# Altium PCB MasterBoard.PcbDoc (part 1 of 3)
Units mil, origin at the board's own origin, x right, y up, seen from the top; angles counter-clockwise.
Board outline 13400 x 7290 mil, 2 copper layers (Top Layer, Bottom Layer); 563 components, 331 nets, 1403 pads, 323 vias.
Unrouted connection lines stored in the file: 87.
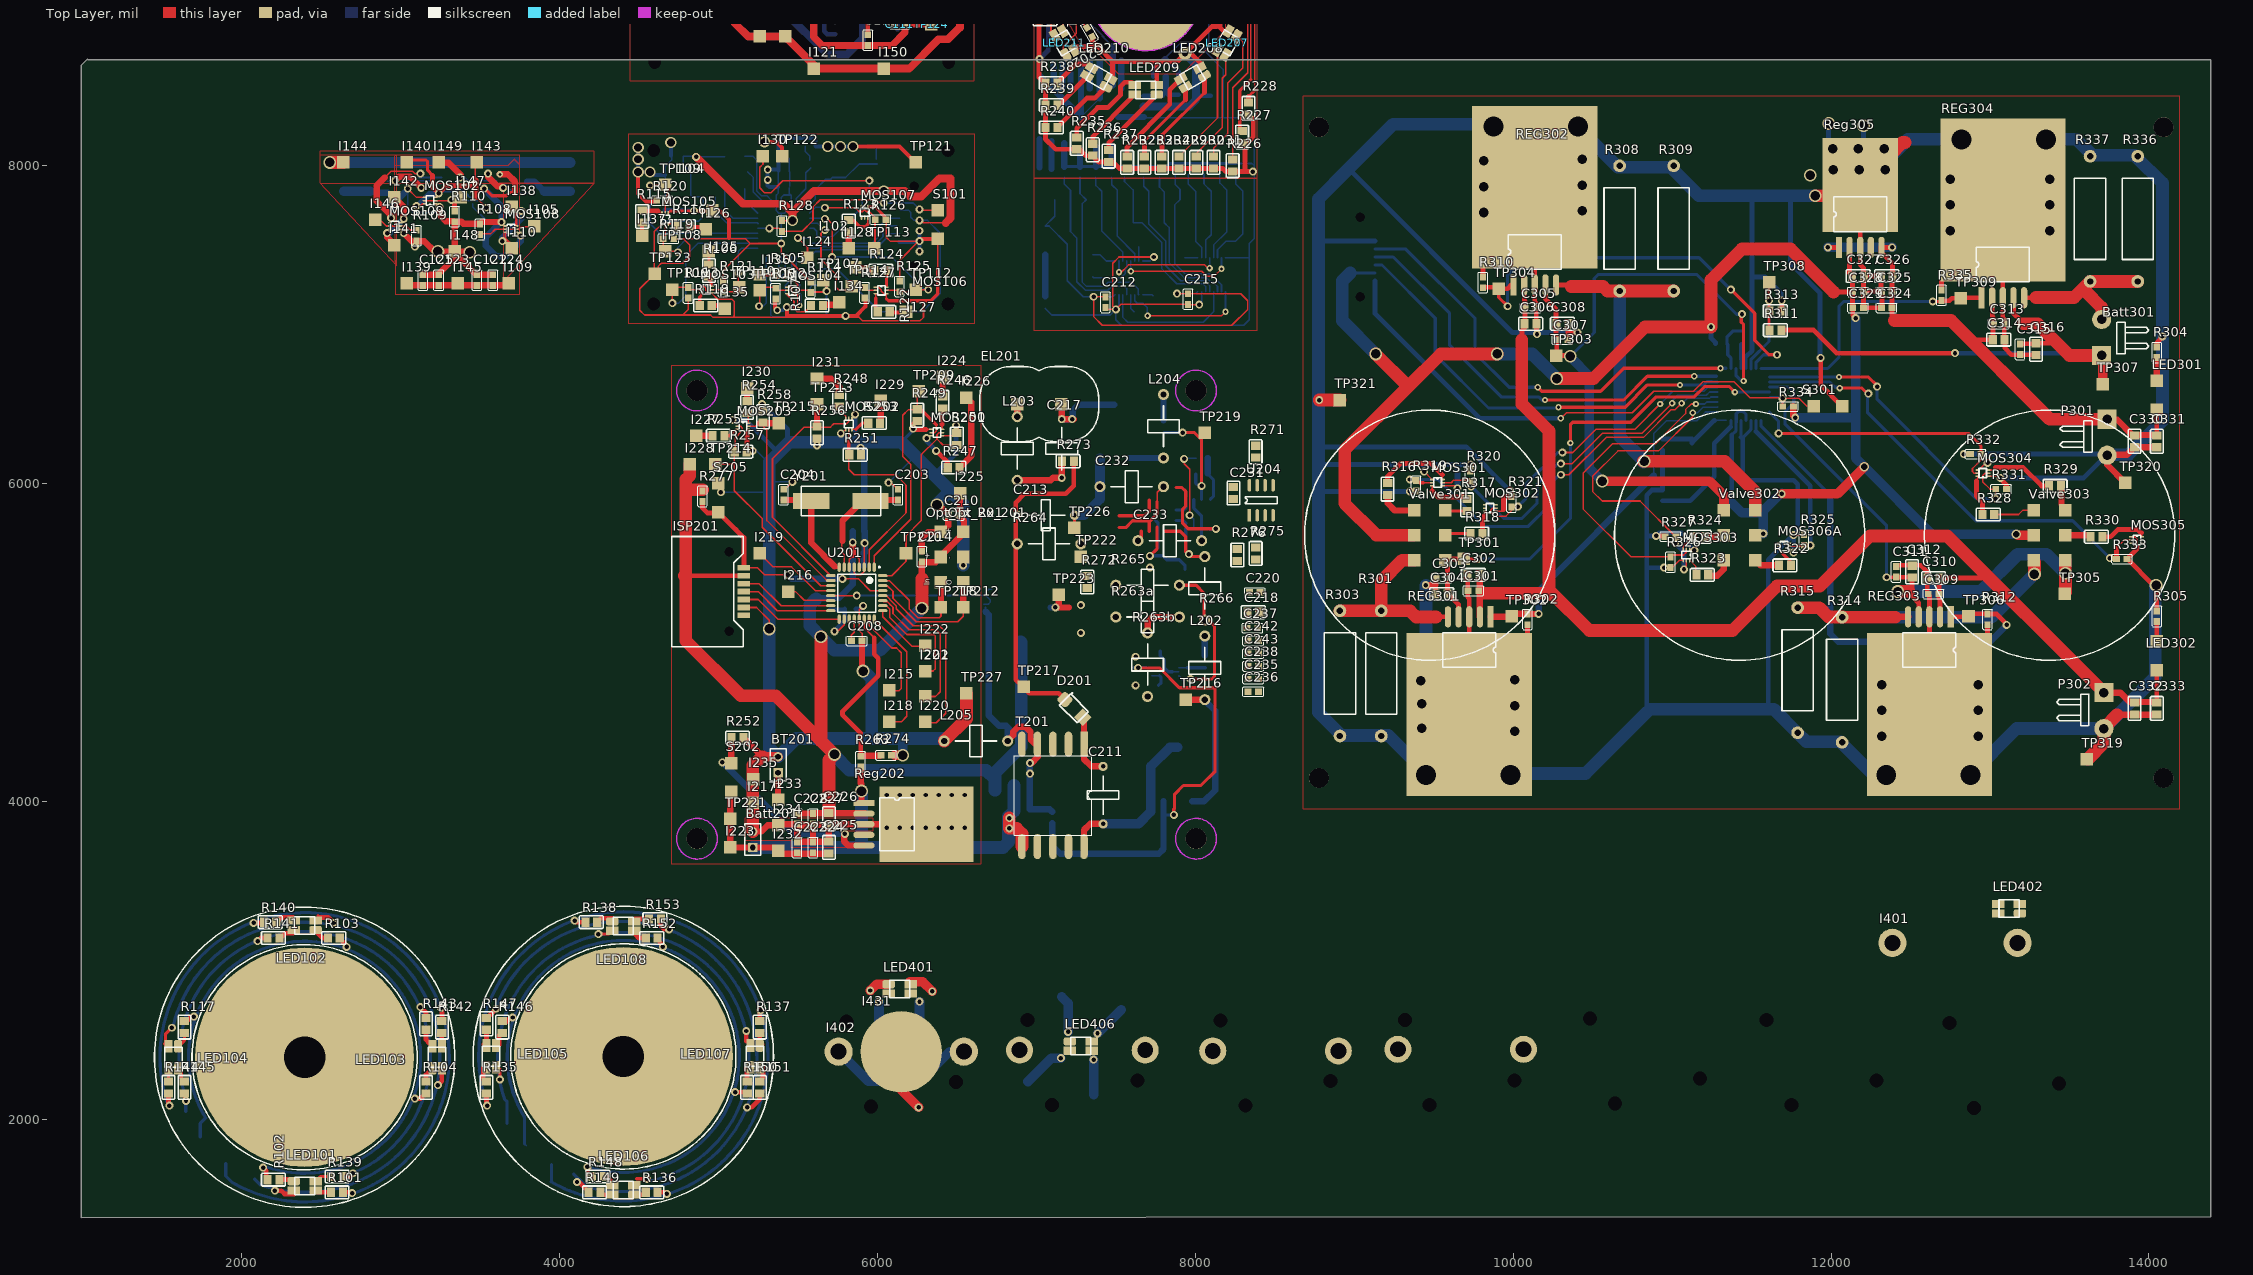
[diagram p0: Top Layer view]
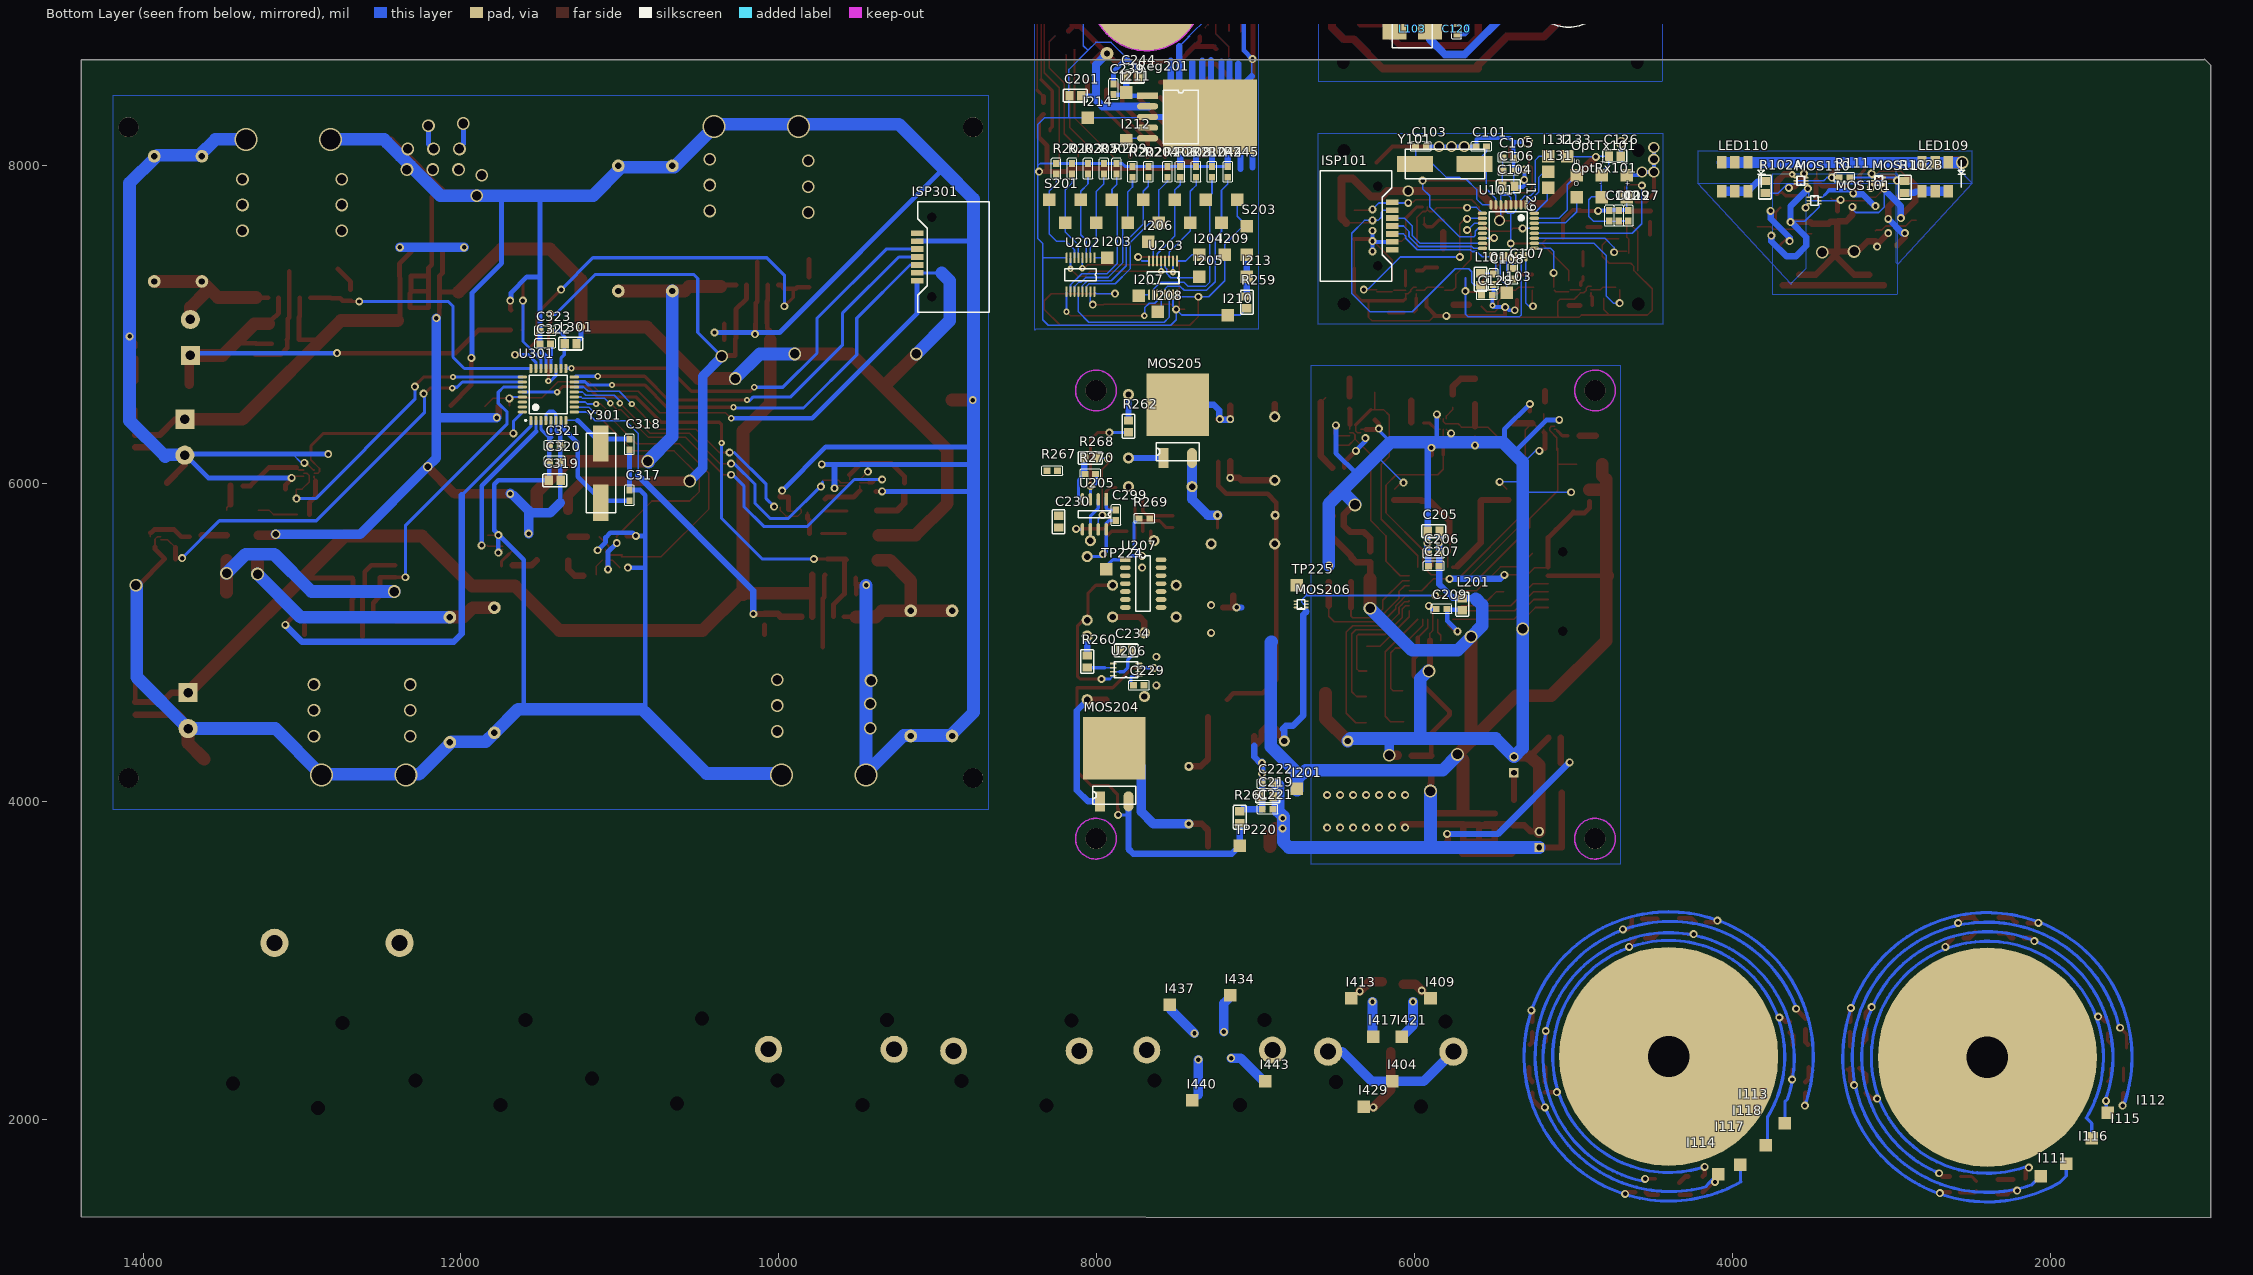
[diagram p1: Bottom Layer view, seen from below]

## Layer stack, top to bottom
Top Layer: signal copper 1.4
Dielectric: dielectric 12.6, FR-4, Dk 4.8
Bottom Layer: signal copper 1.4

## Board outline
990,1380 990,8630 1030,8670 1035,8665 14390,8665 14390,1385

## Design rules (kind name [scope] priority, off if disabled: settings)
Clearance [All] p1: gap=10
ComponentClearance [All] p1 off: gap=10 collisioncheckmode=3 verticalgap=10 showdistances=FALSE
HoleSize [All] p1: absolutevalues=TRUE maxlimit=260 minlimit=1 maxpercent=80.000 minpercent=20.000
MinimumSolderMaskSliver [All] p1: minsoldermaskwidth=2.5
PasteMaskExpansion [All] p1 off: expansion=0
PlaneClearance [All] p1: clearance=39.37
PlaneConnect [All] p1: planeconnectstyle=Relief reliefexpansion=20 reliefentries=4 reliefconductorwidth=10 reliefairgap=20
PolygonConnect [All] p1: connectstyle=Relief reliefconductorwidth=10 reliefentries=4 polygonreliefangle="90 Angle"
RoomDefinition Glasses-LEDBoard [InComponentClass('Glasses-LEDBoard')] p1: confinementstyle=ConfineIn formatcopy=TRUE lockcomponents=FALSE outline 2435,7110 4300,7110 4300,8155 2435,8155
RoomDefinition Glasses-LensBoard [InComponentClass('Glasses-LensBoard')] p2: confinementstyle=ConfineIn formatcopy=TRUE lockcomponents=FALSE outline 1415,1415 5395,1415 5395,3385 1415,3385
RoomDefinition Valve [InComponentClass('Valve')] p3: confinementstyle=ConfineIn formatcopy=TRUE lockcomponents=FALSE outline 5530,1615 14300,1615 14300,3405 5530,3405
RoomDefinition Glasses-PSUBoard [InComponentClass('Glasses-PSUBoard')] p4: confinementstyle=ConfineIn formatcopy=TRUE lockcomponents=FALSE outline 4420,8475 6745,8475 6745,9740 4420,9740
RoomDefinition Glasses [InComponentClass('Glasses')] p5: confinementstyle=ConfineIn formatcopy=TRUE lockcomponents=FALSE outline 4435,6980 6615,6980 6615,8250 4435,8250
RoomDefinition Controller-IOBoard [InComponentClass('Controller-IOBoard')] p6: confinementstyle=ConfineIn formatcopy=TRUE lockcomponents=FALSE outline 8470,6890 8470,10035 6925,10035 6925,6890
RoomDefinition Controller [InComponentClass('Controller')] p7: confinementstyle=ConfineIn formatcopy=TRUE lockcomponents=FALSE outline 4680,3575 8185,3575 8185,6775 4680,6775
RoomDefinition Charger [InComponentClass('Charger')] p8: confinementstyle=ConfineIn formatcopy=TRUE lockcomponents=FALSE outline 8665,3895 14250,3895 14250,8440 8665,8440
RoutingVias [All] p1: holewidth=28 width=50 viastyle="Through Hole" minholewidth=20 minwidth=40 maxholewidth=260 maxwidth=300
SilkToSilkClearance [All] p1 off: silktosilkclearance=10
SilkscreenOverComponentPads [All] p1 off: minsilkscreentomaskgap=10
SolderMaskExpansion [All] p1: expansion=4
Width [All] p1: maxlimit=118.11 minlimit=10 preferedwidth=20
20 further rules are at their usual default settings.

## Classes and differential pairs
component class Valve: I401 I402 I403 I404 I405 I406 I407 I408 I409 I410 I411 I412 I413 I414 I415 I416 I417 I418 I419 I420 I421 I422 I423 I424 I425 I426 I427 I428 I429 I430 I431 I432 I433 I434 I435 I436 I437 I438 I439 I440 I441 I442 I443 I444 LED401 LED402 LED403 LED404 LED405 LED406 LED407
component class Charger: Batt301 C301 C302 C303 C304 C305 C306 C307 C308 C309 C310 C311 C312 C313 C314 C315 C316 C317 C318 C319 C320 C321 C322 C323 C324 C325 C326 C327 C328 C329 C330 C331 C332 C333 D? ISP301 L301 LED301 LED302 MOS301 MOS302 MOS303 MOS304 MOS305 MOS306A P301 P302 R301 R302 R303 R304 R305 R308 R309 R310 R311 R312 R313 R314 R315 R316 R317 R318 R319 R320 R321 R322 R323 R324 R325 R326 R327 R328 R329 R330 R331 R332 R333 R334 R335 R336 R337 R? REG301 REG302 REG303 REG304 Reg305 S301 TP301 TP302 TP303 TP304 TP305 TP306 TP307 TP308 TP309 TP319 TP320 TP321 U301 Valve301 Valve302 Valve303 Y301
component class Controller: Batt201 BT201 C203 C204 C205 C206 C207 C208 C209 C210 C211 C213 C214 C217 C218 C219 C220 C221 C222 C223 C224 C225 C226 C227 C228 C229 C230 C231 C232 C233 C234 C235 C236 C237 C238 C242 C243 C299 D201 EL201 I201 I202 I215 I216 I217 I218 I219 I220 I221 I222 I223 I224 I225 I226 I227 I228 I229 I230 I231 I232 I233 I234 I235 ISP201 L201 L202 L203 L204 L205 MOS201 MOS202 MOS203 MOS204 MOS205 MOS206 Opt_Rx_201 Opt_Tx_201 R246 R247 R248 R249 R250 R251 R252 R253 R254 R255 R256 R257 R258 R260 R261 R262 R263 R263a R263b R264 R265 R266 R267 R268 R269 R270 R271 R272 R273 R274 R275 R276 R277 Reg202 S202 S205 T201 TP209 TP210 TP212 TP213 TP214 TP215 TP216 TP217 TP218 TP219 TP220 TP221 TP222 TP223 TP224 TP225 TP226 TP227 U201 U204 U205 U206 U207 Y201
component class Glasses: C101 C102 C103 C104 C105 C106 C107 C108 C109 C126 C127 C128 I102 I103 I104 I124 I125 I126 I127 I128 I129 I130 I131 I132 I133 I134 I135 I136 I137 I? ISP101 L101 MOS103 MOS104 MOS105 MOS106 MOS107 OptRx101 OptTx101 R105 R106 R107 R112 R113 R114 R115 R116 R118 R119 R120 R121 R122 R123 R124 R125 R126 R127 R128 S101 TP105 TP106 TP107 TP108 TP109 TP110 TP112 TP113 TP114 TP121 TP122 TP123 U101 Y101
component class Controller-IOBoard: C201 C202 C212 C215 C239 C240 C241 C244 I203 I204 I205 I206 I207 I208 I209 I210 I211 I212 I213 I214 LED201 LED202 LED203 LED204 LED205 LED206 LED207 LED208 LED209 LED210 LED211 R201 R202 R203 R204 R205 R206 R207 R208 R209 R210 R211 R212 R213 R214 R215 R216 R217 R218 R219 R220 R221 R222 R223 R224 R225 R226 R227 R228 R229 R230 R231 R232 R233 R234 R235 R236 R237 R238 R239 R240 R241 R242 R243 R244 R245 R259 Reg201 S201 S203 S204 TP201 TP203 TP204 TP205 TP206 TP207 TP208 U202 U203
component class Glasses-LEDBoard: C122 C123 C124 C125 I105 I109 I110 I138 I139 I140 I141 I142 I143 I144 I145 I146 I147 I148 I149 LED109 LED110 MOS101 MOS102 MOS108 MOS109 MOS110 MOS111 R102A R102B R108 R109 R110 R111 TP126
component class Glasses-PSUBoard: C110 C111 C112 C113 C114 C115 C116 C117 C118 C119 C120 C121 D101 D102 I106 I107 I108 I119 I120 I121 I122 I123 I150 I151 L102 L103 PWR101 PWR102 R129 R130 R131 R132 R133 R134 TP116 TP117 TP118 TP119 TP124 Valve101 Valve102 Valve103
component class Glasses-LensBoard: I111 I112 I113 I114 I115 I116 I117 I118 LED101 LED102 LED103 LED104 LED105 LED106 LED107 LED108 R101 R102 R103 R104 R117 R135 R136 R137 R138 R139 R140 R141 R142 R143 R144 R145 R146 R147 R148 R149 R150 R151 R152 R153

## Components (designator, comment, footprint, x,y, rotation, side; value= is the part's Value field where it differs from the comment)
Batt201 "BaseBankSocket" HDR1X2 5215,3710 r90 top
Batt301 "BaseBankSocket" HDR1X2H 13750,6865 r90 top
BT201 "Battery" BAT-2 5375,4230 r90 top
C101 "18pf" 0603 5580,8120 r180 bottom
C102 "100nf" 0603 4775,7685 r270 bottom
C103 "18pf" 0603 5960,8120 r0 bottom
C104 "10uf" 0805 5410,7870 r0 bottom
C105 "1uf" 0603 5410,8050 r0 bottom
C106 "100nf" 0603 5410,7970 r0 bottom
C107 "100nf" 0603 5380,7320 r270 bottom
C108 "100nf" 0603 5505,7285 r90 bottom
C109 "100nf" 0603 4715,7685 r270 bottom
C110 "10uf" 0805 6140,9010 r180 top
C111 "1uf" 0603 6140,8890 r180 top
C112 "10uf" 0805 6340,9050 r90 top
C113 "10uf" 0805 6440,9050 r90 top
C114 "10uf" 0805 6100,9450 r180 bottom
C115 "1uf" 0603 6100,9350 r180 bottom
C116 "10uf" 0805 6275,9360 r0 bottom
C117 "10uf" 0805 6275,9220 r0 bottom
C118 "100nf" 0603 5900,9390 r0 top
C119 "2.2nf" 0603 5940,8790 r90 top
C120 "100nf" 0603 5735,8860 r90 bottom
C121 "2.2nf" 0603 5815,9560 r270 bottom
C122 "1uf" 0603 3480,7280 r270 top
C123 "100nf" 0603 3240,7280 r270 top
C124 "1uf" 0603 3580,7280 r270 top
C125 "100nf" 0603 3140,7280 r270 top
C126 "10uf" 0805 4740,8060 r0 bottom
C127 "1uf" 0603 4655,7685 r270 bottom
C128 "100nf" 0603 5545,7185 r0 bottom
C201 "10uf" 0805 8135,8440 r180 bottom
C202 "1uf" 0603 7335,8840 r300 top
C203 "18pf" 0603 6130,5930 r270 top
C204 "18pf" 0603 5410,5930 r270 top
C205 "10uf" 0805 5880,5700 r180 bottom
C206 "1uf" 0603 5880,5560 r180 bottom
C207 "100nf" 0603 5880,5480 r180 bottom
C208 "100nf" 0603 5870,5010 r180 top
C209 "100nf" 0603 5830,5210 r180 bottom
C210 "100nf" 0603 6480,5800 r0 top
C211 "Cap HV" "10n MU Capacitor (HV)" 7420,4220 r270 top
C212 "1uf" 0603 7435,7140 r270 top
C213 "Cap HV" "10n MU Capacitor (HV)" 7240,5800 r180 top
C214 "100nf" 0603 6280,5540 r270 top
C215 "1uf" 0603 7955,7160 r90 top
C217 "Cap HV" "22N MU Capacitor (HV)" 7160,6405.04 r270 top
C218 "10uf" 0805 8365,5190 r180 top
C219 "10uf" 0805 6925,4030 r0 bottom
C220 "1uf" 0603 8375,5315 r180 top
C221 "1uf" 0603 6925,3950 r0 bottom
C222 "100nf" 0603 6925,4110 r0 bottom
C223 "100nf" 0603 5495,3710 r270 top
C224 "1uf" 0603 5595,3710 r270 top
C225 "10uf" 0805 5695,3710 r270 top
C226 "10uf" 0805 5695,3890 r90 top
C227 "1uf" 0603 5595,3890 r90 top
C228 "100nf" 0603 5495,3890 r90 top
C229 "100nF" 0603 7735,4730 r180 bottom
C230 "10uf" 0805 8240,5760 r270 bottom
C231 "10uf" 0805 8240,5940 r90 top
C232 "Cap Through-Hole" "Axial 0.4 MU" 7400,5980 r0 top
C233 "Cap Through-Hole" "Axial 0.4 MU" 7640,5640 r0 top
C234 "10uf" 0805 7815,4950 r0 bottom
C235 "1uf" 0603 8365,4770 r180 top
C236 "100nf" 0603 8365,4690 r180 top
C237 "1uf" 0603 8360,5090 r180 top
C238 "100nf" 0603 8365,4850 r180 top
C239 "100nf" 0603 7895,8480 r90 bottom
C240 "1uf" 0603 7335,9280 r45 top
C241 "1uf" 0603 8115,9060 r0 top
C242 "1uf" 0603 8365,5010 r180 top
C243 "100nf" 0603 8365,4930 r180 top
C244 "10uf" 0805 7775,8560 r180 bottom
C299 "100nf" 0603 7880,5800 r90 bottom
C301 "1uf" 0603 9750,5325 r0 top
C302 "10uf" 0805 9750,5425 r0 top
C303 "1uf" 0603 9550,5405 r0 top
C304 "10uf" 0805 9550,5305 r0 top
C305 "1uf" 0603 10110,7105 r180 top
C306 "10uf" 0805 10110,7005 r180 top
C307 "1uf" 0603 10310,6905 r180 top
C308 "10uf" 0805 10310,7005 r180 top
C309 "1uf" 0603 12645,5305 r0 top
C310 "10uf" 0805 12645,5405 r0 top
C311 "1uf" 0603 12410,5445 r270 top
C312 "10uf" 0805 12510,5445 r270 top
C313 "1uf" 0603 13055,7005 r180 top
C314 "10uf" 0805 13055,6905 r180 top
C315 "1uf" 0603 13190,6845 r90 top
C316 "10uf" 0805 13290,6845 r90 top
C317 "18pf" 0603 10940,5925 r270 bottom
C318 "18pf" 0603 10940,6245 r90 bottom
C319 "10uf" 0805 11410,6020 r180 bottom
C320 "1uf" 0603 11410,6140 r180 bottom
C321 "100nf" 0603 11410,6240 r180 bottom
C322 "100nf" 0603 11470,6880 r180 bottom
C323 "100nf" 0603 11470,6960 r180 bottom
C324 "100nf" 0603 12350,7105 r0 top
C325 "1uf" 0603 12350,7205 r0 top
C326 "10uf" 0805 12350,7305 r0 top
C327 "10uf" 0805 12170,7305 r180 top
C328 "1uf" 0603 12170,7205 r180 top
C329 "100nf" 0603 12170,7105 r180 top
C330 "10uf" 0805 13910,6265 r90 top
C331 "10uf" 0805 14050,6265 r90 top
C332 "10uf" 0805 13910,4585 r90 top
C333 "10uf" 0805 14050,4585 r90 top
D101 "Diode BYG20D" BYG20J-E3 6380,9310 r180 top
D102 "Diode BYG20D" BYG20J-E3 6155,9100 r180 bottom
D201 "Diode BYG20D" BYG20J-E3 7180,4640 r315 top
EL201 "EL Connector" "HV connector" 6880,6500 r0 top
I102 "TestPoint" TestPoint 5860,7360 r90 top
I103 "TestPoint" TestPoint 5420,7200 r90 bottom
I104 "TestPoint" TestPoint 4960,7720 r90 top
I105 "TestPoint" TestPoint 3840,7620 r180 top
I106 "TestPoint" TestPoint 5100,9610 r90 top
I107 "TestPoint" TestPoint 4680,8950 r0 top
I108 "TestPoint" TestPoint 4680,9310 r0 top
I109 "TestPoint" TestPoint 3680,7260 r0 top
I110 "TestPoint" TestPoint 3700,7480 r0 top
I111 "TestPoint" TestPoint 2060,1640 r90 bottom
I112 "TestPoint" TestPoint 1640,2040 r90 bottom
I113 "TestPoint" TestPoint 3670,1975 r270 bottom
I114 "TestPoint" TestPoint 4090,1655 r270 bottom
I115 "TestPoint" TestPoint 1740,1880 r90 bottom
I116 "TestPoint" TestPoint 1900,1720 r90 bottom
I117 "TestPoint" TestPoint 3950,1715 r270 bottom
I118 "TestPoint" TestPoint 3790,1835 r270 bottom
I119 "TestPoint" TestPoint 4680,9130 r0 top
I120 "TestPoint" TestPoint 5660,9490 r90 top
I121 "TestPoint" TestPoint 5600,8610 r90 top
I122 "TestPoint" TestPoint 5600,9110 r90 top
I123 "TestPoint" TestPoint 6520,9410 r90 top
I124 "TestPoint" TestPoint 5560,7420 r0 top
I125 "TestPoint" TestPoint 4940,7460 r0 top
I126 "TestPoint" TestPoint 4920,7600 r270 top
I127 "TestPoint" TestPoint 6180,7080 r0 top
I128 "TestPoint" TestPoint 5820,7480 r90 top
I129 "TestPoint" TestPoint 5160,7860 r180 bottom
I130 "TestPoint" TestPoint 5280,8060 r0 top
I131 "TestPoint" TestPoint 5160,7960 r180 bottom
I132 "TestPoint" TestPoint 5160,8060 r180 bottom
I133 "TestPoint" TestPoint 5040,8060 r180 bottom
I134 "TestPoint" TestPoint 5760,7140 r0 top
I135 "TestPoint" TestPoint 5040,7100 r0 top
I136 "TestPoint" TestPoint 5260,7315 r0 top
I137 "TestPoint" TestPoint 4520,7560 r270 top
I138 "TestPoint" TestPoint 3700,7740 r90 top
I139 "TestPoint" TestPoint 3040,7260 r90 top
I140 "TestPoint" TestPoint 3040,8020 r90 top
I141 "TestPoint" TestPoint 2960,7500 r90 top
I142 "TestPoint" TestPoint 2960,7800 r90 top
I143 "TestPoint" TestPoint 3480,8020 r90 top
I144 "TestPoint" TestPoint 2640,8020 r90 top
I145 "TestPoint" TestPoint 3360,7260 r90 top
I146 "TestPoint" TestPoint 2840,7660 r90 top
I147 "TestPoint" TestPoint 3380,7800 r90 top
I148 "TestPoint" TestPoint 3340,7460 r90 top
I149 "TestPoint" TestPoint 3240,8020 r90 top
I150 "TestPoint" TestPoint 6040,8610 r90 top
I151 "TestPoint" TestPoint 5300,9410 r90 top
I201 "TestPoint" TestPoint 6740,4080 r0 bottom
I202 "TestPoint" TestPoint 6300,4660 r270 top
I203 "TestPoint" TestPoint 7935,7420 r0 bottom
I204 "TestPoint" TestPoint 7355,7440 r0 bottom
I205 "TestPoint" TestPoint 7355,7300 r180 bottom
I206 "TestPoint" TestPoint 7675,7520 r180 bottom
I207 "TestPoint" TestPoint 7735,7180 r180 bottom
I208 "TestPoint" TestPoint 7615,7080 r180 bottom
I209 "TestPoint" TestPoint 7195,7440 r180 bottom
I210 "TestPoint" TestPoint 7175,7060 r180 bottom
I211 "TestPoint" TestPoint 7815,8460 r180 bottom
I212 "TestPoint" TestPoint 7815,8160 r180 bottom
I213 "TestPoint" TestPoint 7055,7300 r180 bottom
I214 "TestPoint" TestPoint 8055,8300 r180 bottom
I215 "TestPoint" TestPoint 6075,4700 r90 top
I216 "TestPoint" TestPoint 5440,5320 r90 top
I217 "TestPoint" TestPoint 5215,3990 r90 top
I218 "TestPoint" TestPoint 6075,4500 r90 top
I219 "TestPoint" TestPoint 5260,5560 r90 top
I220 "TestPoint" TestPoint 6300,4500 r90 top
I221 "TestPoint" TestPoint 6300,4820 r90 top
I222 "TestPoint" TestPoint 6300,4980 r90 top
I223 "TestPoint" TestPoint 5075,3710 r90 top
I224 "TestPoint" TestPoint 6410,6670 r90 top
I225 "TestPoint" TestPoint 6520,5940 r90 top
I226 "TestPoint" TestPoint 6560,6540 r90 top
I227 "TestPoint" TestPoint 4860,6300 r90 top
I228 "TestPoint" TestPoint 4820,6120 r90 top
I229 "TestPoint" TestPoint 6020,6520 r90 top
I230 "TestPoint" TestPoint 5180,6600 r90 top
I231 "TestPoint" TestPoint 5620,6660 r90 top
I232 "TestPoint" TestPoint 5375,3690 r90 top
I233 "TestPoint" TestPoint 5375,4010 r90 top
I234 "TestPoint" TestPoint 5375,3850 r90 top
I235 "TestPoint" TestPoint 5220,4140 r90 top
I401 "Battery +VE" ValveBattery+VE 12780,3110 r180 top
I402 "Battery +VE" ValveBattery+VE 6150,2425 r180 top
I403 "ValvePad+ve" TestPoint 38965,2065 r0 top
I404 "ValvePad+ve" TestPoint 6140,2240 r180 bottom
I405 "ValvePad-ve" TestPoint 37825,2065 r0 top
I406 "ValvePad-ve" TestPoint 38395,2065 r0 top
I407 "Battery -VE" ValveBattery-VE 35865,2065 r0 top
I408 "Battery -VE" ValveBattery-VE 36435,2065 r0 top
I409 "ValvePadR" TestPoint 5900,2760 r180 bottom
I410 "ValvePadR" TestPoint 35295,2065 r0 top
I411 "ValvePadR" TestPoint 33585,2065 r0 top
I412 "ValvePadR" TestPoint 34155,2065 r0 top
I413 "ValvePadG" TestPoint 6400,2760 r180 bottom
I414 "ValvePadG" TestPoint 33020,2065 r0 top
I415 "ValvePadG" TestPoint 31310,2065 r0 top
I416 "ValvePadG" TestPoint 31880,2065 r0 top
I417 "ValvePadB" TestPoint 6260,2520 r180 bottom
I418 "ValvePadB" TestPoint 30740,2065 r0 top
I419 "ValvePadB" TestPoint 29030,2065 r0 top
I420 "ValvePadB" TestPoint 29600,2065 r0 top
I421 "ValvePadVcc" TestPoint 6080,2520 r180 bottom
I422 "ValvePadVcc" TestPoint 28460,2065 r0 top
I423 "ValvePadVcc" TestPoint 26750,2065 r0 top
I424 "ValvePadVcc" TestPoint 27320,2065 r0 top
I425 "Battery +VE" ValveBattery+VE 26020,1835 r90 top
I426 "Battery +VE" ValveBattery+VE 26300,1835 r90 top
I427 "ValvePad+ve" TestPoint 25050,2065 r0 top
I428 "ValvePad+ve" TestPoint 25620,2065 r0 top
I429 "ValvePad-ve" TestPoint 6320,2080 r180 bottom
I430 "ValvePad-ve" TestPoint 23250,2065 r0 top
I431 "Battery -VE" ValveBattery-VE 6150,2425 r0 top
I432 "Battery -VE" ValveBattery-VE 22110,2065 r0 top
I433 "ValvePadR" TestPoint 20970,2065 r0 top
I434 "ValvePadR" TestPoint 7160,2780 r180 bottom
I435 "ValvePadR" TestPoint 20400,2065 r0 top
I436 "ValvePadG" TestPoint 19260,2065 r0 top
I437 "ValvePadG" TestPoint 7540,2720 r180 bottom
I438 "ValvePadG" TestPoint 18690,2065 r0 top
I439 "ValvePadB" TestPoint 17550,2065 r0 top
I440 "ValvePadB" TestPoint 7400,2120 r180 bottom
I441 "ValvePadB" TestPoint 16980,2065 r0 top
I442 "ValvePadVcc" TestPoint 15840,2065 r0 top
I443 "ValvePadVcc" TestPoint 6940,2240 r180 bottom
I444 "ValvePadVcc" TestPoint 15270,2065 r0 top
ISP101 "SATA" SATA 6140,7620 r90 bottom
ISP201 "SATA" SATA 5160,5320 r90 top
ISP301 "SATA" SATA 9130,7425 r270 bottom
L101 "10uH" 0805 5585,7285 r270 bottom
L102 "ELL-6PG4R7N" ELL6PG4R7N-2CHK 6140,9550 r0 top
L103 "ELL-6PG4R7N" ELL6PG4R7N-2CHK 6015,8860 r0 bottom
L201 "10uH" 0805 5700,5240 r90 bottom
L202 "Inductor" "Axial 0.4 MU" 8060,5040 r270 top
L203 "Inductor" "Axial 0.4 MU" 6880,6020 r90 top
L204 "Inductor" "Axial 0.4 MU" 7800,6560 r270 top
L205 "Inductor" "Axial 0.4 MU" 6820,4380 r180 top
L301 "10uH" 0805 11310,6880 r180 bottom
LED101 "Tri LED" CLV1A-FKB 2396.34,1580 r0 top
LED102 "Tri LED" CLV1A-FKB 2396.34,3220 r180 top
LED103 "Tri LED" CLV1A-FKB 3230,2390 r90 top
LED104 "Tri LED" CLV1A-FKB 1570,2390 r270 top
LED105 "Tri LED" CLV1A-FKB 3570,2395 r90 top
LED106 "Tri LED" CLV1A-FKB 4401.34,1555 r180 top
LED107 "Tri LED" CLV1A-FKB 5230,2395 r270 top
LED108 "Tri LED" CLV1A-FKB 4401.34,3215 r0 top
LED109 "LED_head" "LED Headlamp" 2725,7930 r270 bottom
LED110 "LED_head" "LED Headlamp" 3985,7930 r270 bottom
LED201 "Tri LED" CLV1A-FKB 7175,9360 r60 top
LED202 "Tri LED" CLV1A-FKB 7392.95,9579.21 r30 top
LED203 "Tri LED" CLV1A-FKB 7688.23,9657.95 r0 top
LED204 "Tri LED" CLV1A-FKB 7983.5,9579.21 r330 top
LED205 "Tri LED" CLV1A-FKB 8200.04,9362.68 r300 top
LED206 "Tri LED" CLV1A-FKB 8278.78,9067.4 r270 top
LED207 "Tri LED" CLV1A-FKB 8200.04,8772.13 r240 top
LED208 "Tri LED" CLV1A-FKB 7983.5,8555.59 r210 top
LED209 "Tri LED" CLV1A-FKB 7688.23,8476.85 r180 top
LED210 "Tri LED" CLV1A-FKB 7392.95,8555.59 r150 top
LED211 "Tri LED" CLV1A-FKB 7176.42,8772.13 r120 top
LED301 "LED_head" "2 pin switch (surface mount)" 14050,6465 r90 top
LED302 "LED_head" "2 pin switch (surface mount)" 14050,4825 r90 top
LED401 "Tri LED" CLV1A-FKB 6140,2820 r0 top
LED402 "Tri LED" CLV1A-FKB 13120,3325 r180 top
LED403 "Tri LED" CLV1A-FKB 36825,2210 r90 top
LED404 "Tri LED" CLV1A-FKB 37235,2210 r90 top
LED405 "Tri LED" CLV1A-FKB 24460,2210 r90 top
LED406 "Tri LED" CLV1A-FKB 7280,2460 r0 top
LED407 "Tri LED" CLV1A-FKB 24050,2210 r90 top
MOS101 "EM6K7T2RCT-ND" EM6K7T2R-EMT6 3520,7800 r180 bottom
MOS102 "EM6K7T2RCT-ND" EM6K7T2R-EMT6 3220,7760 r180 top
MOS103 "EM6K7T2RCT-ND" EM6K7T2R-EMT6 4890,7240 r0 top
MOS104 "EM6K7T2RCT-ND" EM6K7T2R-EMT6 5500,7195 r180 top
MOS105 "EM6K7T2RCT-ND" EM6K7T2R-EMT6 4685,7700 r270 top
MOS106 "EM6K7T2RCT-ND" EM6K7T2R-EMT6 5990,7235 r0 top
MOS107 "EM6K7T2RCT-ND" EM6K7T2R-EMT6 5940,7740 r270 top
MOS108 "EM6K7T2RCT-ND" EM6K7T2R-EMT6 3660,7620 r0 top
MOS109 "EM6K7T2RCT-ND" EM6K7T2R-EMT6 3000,7600 r180 top
MOS110 "EM6K7T2RCT-ND" EM6K7T2R-EMT6 3535,7885 r0 bottom
MOS111 "EM6K7T2RCT-ND" EM6K7T2R-EMT6 3115,7925 r180 bottom
MOS201 "EM6K7T2RCT-ND" EM6K7T2R-EMT6 6340,6340 r0 top
MOS202 "EM6K7T2RCT-ND" EM6K7T2R-EMT6 5800,6340 r90 top
MOS203 "EM6K7T2RCT-ND" EM6K7T2R-EMT6 5120,6380 r0 top
MOS204 "STD5NK52ZD" DPAK 7980,4000 r90 bottom
MOS205 "STD5NK52ZD" DPAK 7580,6160 r90 bottom
MOS206 "EM6K7T2RCT-ND" EM6K7T2R-EMT6 6680,5220 r0 bottom
MOS301 "EM6K7T2RCT-ND" EM6K7T2R-EMT6 9490,6025 r0 top
MOS302 "EM6K7T2RCT-ND" EM6K7T2R-EMT6 9890,5825 r180 top
MOS303 "EM6K7T2RCT-ND" EM6K7T2R-EMT6 11110,5585 r270 top
MOS304 "EM6K7T2RCT-ND" EM6K7T2R-EMT6 12990,6045 r180 top
MOS305 "EM6K7T2RCT-ND" EM6K7T2R-EMT6 13890,5665 r0 top
MOS306A "EM6K7T2RCT-ND" EM6K7T2R-EMT6 11670,5625 r0 top
Opt_Rx_201 "TORX177" "Optical RX" 6540,5380 r90 top
Opt_Tx_201 "LTDL-TX12P03" "Optical TX" 6400,5380 r90 top
OptRx101 "TORX177" "Optical RX" 4980,7800 r180 bottom
OptTx101 "LTDL-TX12P03" "Optical TX" 4980,7940 r180 bottom
P301 "12VDC In" HDR1X2H 13690,6345 r270 top
P302 "3V3 In" HDR1X2H 13670,4625 r270 top
PWR101 "TPS61085PWR" TPS61085-MSOP8 6020,9130 r90 top
PWR102 "TPS61085PWR" TPS61085-MSOP8 5815,9260 r270 bottom
R101 "56R" 0805 2600,1540 r180 top
R102 "67R" 0805 2200,1620 r0 top
R102A "Res3" 0805 3795,7865 r90 bottom
R102B "Res3" 0805 2915,7865 r270 bottom
R103 "67R" 0805 2580,3140 r180 top
R104 "67R" 0805 3160,2200 r90 top
R105 "Res3" 0805 5400,7315 r0 top
R106 "Res3" 0805 4940,7340 r270 top
R107 "Res3" 0805 5620,7120 r180 top
R108 "10k" 0603 3500,7600 r270 top
R109 "10k" 0603 3100,7560 r90 top
R110 "10k" 0603 3340,7680 r90 top
R111 "10k" 0603 3295,7925 r0 bottom
R112 "10k" 0603 5360,7195 r90 top
R113 "10k" 0603 4810,7200 r90 top
R114 "10k" 0603 5580,7235 r270 top
R115 "Res3" 0805 4520,7680 r90 top
R116 "Res3" 0805 4780,7620 r180 top
R117 "67R" 0805 1640,2580 r270 top
R118 "Res3" 0805 4920,7120 r180 top
R119 "10k" 0603 4685,7540 r180 top
R120 "10k" 0603 4645,7780 r0 top
R121 "10k" 0603 5030,7240 r270 top
R122 "Res3" 0805 6040,7080 r180 top
R123 "Res3" 0805 5820,7620 r90 top
R124 "Res3" 0805 6020,7340 r0 top
R125 "10k" 0603 6140,7240 r270 top
R126 "10k" 0603 6020,7660 r180 top
R127 "10k" 0603 5920,7200 r90 top
R128 "10k" 0603 5400,7620 r90 top
R129 "54.9k" 0603 6300,9190 r0 top
R130 "54.9k" 0603 6035,9220 r0 bottom
R131 "22K" 0603 5940,8970 r90 top
R132 "18K" 0603 5900,9190 r0 top
R133 "22k" 0603 5815,9400 r270 bottom
R134 "18k" 0603 5935,9540 r180 bottom
R135 "67R" 0805 3540,2200 r90 top
R136 "67R" 0805 4580,1540 r180 top
R137 "67R" 0805 5260,2580 r270 top
R138 "67R" 0805 4200,3240 r0 top
R139 "56R" 0805 2600,1640 r180 top
R140 "56R" 0805 2180,3240 r0 top
R141 "56R" 0805 2200,3140 r0 top
R142 "56R" 0805 3260,2580 r270 top
R143 "56R" 0805 3160,2600 r270 top
R144 "56R" 0805 1540,2200 r90 top
R145 "56R" 0805 1640,2200 r90 top
R146 "56R" 0805 3640,2580 r270 top
R147 "56R" 0805 3540,2600 r270 top
R148 "56R" 0805 4240,1640 r0 top
R149 "56R" 0805 4220,1540 r0 top
R150 "56R" 0805 5180,2200 r90 top
R151 "56R" 0805 5260,2200 r90 top
R152 "56R" 0805 4580,3140 r180 top
R153 "56R" 0805 4600,3260 r180 top
R201 "10k" 0603 8255,7980 r90 bottom
R202 "10k" 0603 7775,7960 r270 bottom
R203 "10k" 0603 8155,7980 r90 bottom
R204 "10k" 0603 7675,7960 r270 bottom
R205 "10k" 0603 8055,7980 r90 bottom
R206 "10k" 0603 7555,7960 r270 bottom
R207 "10k" 0603 7955,7980 r90 bottom
R208 "10k" 0603 7475,7960 r270 bottom
R209 "10k" 0603 7875,7980 r90 bottom
R210 "10k" 0603 7375,7960 r270 bottom
R211 "Res1" 0805 7175,9700 r270 top
R212 "Res1" 0805 7075,9620 r270 top
R213 "Res1" 0805 7035,9440 r270 top
R214 "Res1" 0805 7480,9900 r270 top
R215 "Res1" 0805 7377.5,9900 r270 top
R216 "Res1" 0805 7275,9840 r270 top
R217 "Res1" 0805 7795,9900 r270 top
R218 "Res1" 0805 7695,9900 r270 top
R219 "Res1" 0805 7582.5,9900 r270 top
R220 "Res1" 0805 8095,9840 r270 top
R221 "Res1" 0805 7995,9880 r270 top
R222 "Res1" 0805 7890,9900 r270 top
R223 "Res1" 0805 8335,9520 r270 top
R224 "Res1" 0805 8295,9720 r270 top
R225 "Res1" 0805 8195,9760 r270 top
R226 "Res1" 0805 8235,8000 r90 top
R227 "Res1" 0805 8295,8180 r90 top
R228 "Res1" 0805 8335,8360 r90 top
R229 "Res1" 0805 7897.5,8020 r90 top
R230 "Res1" 0805 8006.25,8020 r90 top
R231 "Res1" 0805 8115,8020 r90 top
R232 "Res1" 0805 7571.25,8020 r90 top
R233 "Res1" 0805 7680,8020 r90 top
R234 "Res1" 0805 7788.75,8020 r90 top
R235 "Res1" 0805 7255,8140 r90 top
R236 "Res1" 0805 7355,8100 r90 top
R237 "Res1" 0805 7455,8060 r90 top
R238 "Res1" 0805 7095,8520 r0 top
R239 "Res1" 0805 7095,8380 r0 top
R240 "Res1" 0805 7095,8240 r0 top
R241 "Res1" 0805 7075,9040 r0 top
R242 "Res1" 0805 7055,8920 r0 top
R243 "Res1" 0805 7075,9140 r0 top
R244 "10k" 0603 7275,7960 r270 bottom
R245 "10k" 0603 7175,7960 r90 bottom
R246 "Res3" 0805 6410,6510 r270 top
R247 "Res3" 0805 6480,6100 r180 top
R248 "Res3" 0805 5760,6520 r270 top
R249 "Res3" 0805 6250,6430 r90 top
R250 "Res3" 0805 6500,6280 r270 top
R251 "Res3" 0805 5860,6180 r180 top
R252 "Res1" 0805 5120,4400 r0 top
R253 "Res3" 0805 5980,6380 r180 top
R254 "Res3" 0805 5180,6480 r270 top
R255 "Res3" 0805 5000,6300 r0 top
R256 "Res3" 0805 5620,6320 r90 top
R257 "Res3" 0805 5140,6200 r180 top
R258 "Res3" 0805 5280,6420 r270 top
R259 "Res1" 0805 7055,7140 r270 bottom
R260 "4R5" 0805 8060,4880 r270 bottom
R261 "330R" 0805 7100,3900 r90 bottom
R262 "4R5" 0805 7800,6360 r270 bottom
R263 "10k" 0603 5895,4250 r90 top
R263a "Precision ThroughHole" "Axial 0.4 MU" 7900,5160 r180 top
R263b "Precision ThroughHole" "Axial 0.4 MU" 7700,4660 r90 top
R264 "Precision ThroughHole" "Axial 0.4 MU" 7280,5620 r180 top
R265 "Precision ThroughHole" "Axial 0.4 MU" 7900,5360 r180 top
R266 "Precision ThroughHole" "Axial 0.4 MU" 8060,5140 r90 top
R267 "18k" 0603 8280,6080 r0 bottom
R268 "7.2k" 0805 8040,6160 r180 bottom
R269 "10k" 0603 7700,5780 r180 bottom
R270 "10k" 0603 8040,6060 r0 bottom
R271 "8.2k" 0805 8380,6200 r270 top
R272 "33k" 0805 7320,5380 r270 top
R273 "10R" 0805 7200,6140 r180 top
R274 "10k" 0603 6055,4290 r0 top
R275 "Res3" 0805 8380,5560 r90 top
R276 "Res3" 0805 8265,5550 r90 top
R277 "10k" 0603 4900,5920 r90 top
R301 "2R2 1W" "Resistor 1W" 9170,4805 r270 top
R302 "10k" 0603 10090,5145 r90 top
R303 "2R2 1W" "Resistor 1W" 8910,4805 r270 top
R304 "10k" 0603 14050,6825 r270 top
R305 "10k" 0603 14050,5165 r270 top
R308 "2R2 1W" "Resistor 1W" 10670,7605 r90 top
R309 "2R2 1W" "Resistor 1W" 11010,7605 r90 top
R310 "10k" 0603 9810,7265 r270 top
R311 "Res3" 0805 11650,6965 r0 top
R312 "10k" 0603 12985,5145 r90 top
R313 "Res3" 0805 11650,7085 r180 top
R314 "2R2 1W" "Resistor 1W" 12070,4765 r90 top
R315 "2R2 1W" "Resistor 1W" 11790,4825 r90 top
R316 "Res3" 0805 9210,5965 r90 top
R317 "Res3" 0805 9710,5865 r90 top
R318 "Res3" 0805 9770,5685 r0 top
R319 "10k" 0603 9390,5985 r90 top
R320 "10k" 0603 9730,6045 r270 top
R321 "10k" 0603 9990,5885 r270 top
R322 "Res3" 0805 11710,5485 r0 top
R323 "Res3" 0805 11190,5425 r180 top
R324 "Res3" 0805 11170,5665 r180 top
R325 "10k" 0603 11830,5645 r270 top
R326 "10k" 0603 10990,5505 r90 top
R327 "10k" 0603 10990,5665 r0 top
R328 "Res3" 0805 12990,5805 r180 top
R329 "Res3" 0805 13410,5985 r180 top
R330 "Res3" 0805 13670,5665 r0 top
R331 "10k" 0603 13070,5965 r180 top
R332 "10k" 0603 12910,6185 r0 top
R333 "10k" 0603 13830,5525 r180 top
R334 "10k" 0603 11730,6485 r0 top
R335 "10k" 0603 12695,7185 r270 top
R336 "2R2 1W" "Resistor 1W" 13930,7665 r270 top
R337 "2R2 1W" "Resistor 1W" 13630,7665 r270 top
Reg201 "Reg104-5" REG104-5-DDPAK5 7680,8440 r180 bottom
Reg202 "Reg104-5" REG104-5-DDPAK5 5915,3990 r0 top
REG301 "TPS7A4501DCQR" "TPS7A4501KTTR heatsinked" 9590,5165 r270 top
REG302 "TPS7A4501DCQR" "TPS7A4501KTTR heatsinked" 10270,7245 r90 top
REG303 "TPS7A4501DCQR" "TPS7A4501KTTR heatsinked" 12485,5165 r270 top
REG304 "TPS7A4501KTTR" "TPS7A4501KTTR heatsinked" 13215,7165 r90 top
Reg305 "Reg104-5" REG104-5-DDPAK5 12050,7485 r90 top
S101 "SW-PB" "2 pin switch (surface mount)" 6380,7720 r270 top
S201 "SW-12WAY" "switch pad layout" 7215,7640 r90 bottom
S202 "SW-KEY" "2 pin switch (surface mount)" 5080,4060 r90 top
S203 "SW-SPST" "2 pin switch (surface mount)" 7055,7620 r270 bottom
S204 "SW-12WAY" "12 pole switch" 7688.23,9067.4 r90 top
S205 "SW-PB" "2 pin switch (surface mount)" 5000,5820 r90 top
S301 "SW-PB" "2 pin switch (surface mount)" 11890,6485 r0 top
T201 "SI3210 SMD Transformer" "SI3210 SMD Transformer" 7300,4360 r270 top
TP105 "TestPoint" TestPoint 5260,7215 r90 top
TP106 "TestPoint" TestPoint 4710,7220 r90 top
TP107 "TestPoint" TestPoint 5660,7280 r90 top
TP108 "TestPoint" TestPoint 4665,7460 r0 top
TP109 "TestPoint" TestPoint 4665,7880 r0 top
TP110 "TestPoint" TestPoint 5130,7235 r90 top
TP112 "TestPoint" TestPoint 6240,7220 r90 top
TP113 "TestPoint" TestPoint 5980,7480 r180 top
TP114 "TestPoint" TestPoint 5840,7240 r90 top
TP116 "TestPoint" TestPoint 6520,9410 r90 bottom
TP117 "TestPoint" TestPoint 5840,9590 r90 top
TP118 "TestPoint" TestPoint 6520,9290 r90 top
TP119 "TestPoint" TestPoint 5500,9490 r90 top
TP121 "TestPoint" TestPoint 6240,8020 r90 top
TP122 "TestPoint" TestPoint 5400,8060 r90 top
TP123 "TestPoint" TestPoint 4600,7320 r90 top
TP124 "TestPoint" TestPoint 6340,8890 r90 top
TP209 "TestPoint" TestPoint 6260,6580 r90 top
TP210 "TestPoint" TestPoint 6180,5560 r90 top
TP212 "TestPoint" TestPoint 6540,5220 r90 top
TP213 "TestPoint" TestPoint 5620,6500 r90 top
TP214 "TestPoint" TestPoint 4980,6120 r90 top
TP215 "TestPoint" TestPoint 5380,6380 r90 top
TP216 "TestPoint" TestPoint 7940,4640 r90 top
TP217 "TestPoint" TestPoint 6920,4720 r180 top
TP218 "TestPoint" TestPoint 6400,5220 r90 top
TP219 "TestPoint" TestPoint 8060,6320 r180 top
TP220 "TestPoint" TestPoint 7100,3720 r90 bottom
TP221 "TestPoint" TestPoint 5075,3890 r90 top
TP222 "TestPoint" TestPoint 7280,5540 r180 top
TP223 "TestPoint" TestPoint 7140,5300 r180 top
TP224 "TestPoint" TestPoint 7940,5460 r0 bottom
TP225 "TestPoint" TestPoint 6740,5360 r90 bottom
TP226 "TestPoint" TestPoint 7240,5720 r180 top
TP227 "TestPoint" TestPoint 6560,4680 r90 top
TP301 "TestPoint" TestPoint 9690,5525 r90 top
TP302 "TestPoint" TestPoint 9990,5165 r90 top
TP303 "TestPoint" TestPoint 10270,6805 r90 top
TP304 "TestPoint" TestPoint 9910,7225 r90 top
TP305 "TestPoint" TestPoint 13470,5305 r90 top
TP306 "TestPoint" TestPoint 12865,5165 r90 top
TP307 "TestPoint" TestPoint 13710,6625 r90 top
TP308 "TestPoint" TestPoint 11610,7265 r90 top
TP309 "TestPoint" TestPoint 12815,7165 r90 top
TP319 "TestPoint" TestPoint 13610,4265 r90 top
TP320 "TestPoint" TestPoint 13850,6005 r90 top
TP321 "TestPoint" TestPoint 8910,6525 r90 top
U101 "ATmega8L-8AI" ATMega_GOOD 5410,7590 r270 bottom
U201 "ATmega8L-8AI" ATMega_GOOD 5870,5310 r270 top
U202 "FSAL200" FSAL200-16QSOP 8015,7420 r270 bottom
U203 "FSAL200" FSAL200-16QSOP 7495,7400 r270 bottom
U204 "NE555" NE555 8340,5800 r90 top
U205 "NE555" NE555 7940,5900 r270 bottom
U206 "MCP1630v" "8MSOP (MCP Alternative)" 7735,4790 r0 bottom
U207 "74AC04SC" "74AC04SC 14-SOIC" 7820,5520 r180 bottom
U301 "ATmega8L-8AI" ATMega_GOOD 11450,6560 r90 bottom
Valve101 "Valve_pcb connector" "Valve_pcb mount" 5031.65,9127.17 r90 top
Valve102 "Header 3H" "Valve_3 pin" 5260,8970 r270 top
Valve103 "Header 3H" "Valve_3 pin" 5420,8970 r270 top
Valve301 "6+SHIELD DIN" "Valve male" 9573.43,5675 r90 top
Valve302 "6+SHIELD DIN" "Valve male" 11326.57,5675 r270 top
Valve303 "6+SHIELD DIN" "Valve male" 13473.43,5675 r90 top
Y101 "XTAL" ABLS-16MHz-B4-T 5810,8010 r0 bottom
Y201 "XTAL" ABLS-16MHz-B4-T 5770,5890 r180 top
Y301 "XTAL" ABLS-16MHz-B4-T 11120,6065 r90 bottom

## Footprints (in the part's own frame and the unit in brackets; to place one, negate y for a bottom-side part, rotate by r counter-clockwise, add the part's x,y. Pads: shape width x height; smd on the part's side, far side on the other; paste and mask are expansions set on the pad)
"2 pin switch (surface mount)" [mm]
  rect 2x2 smd: 1(0,0) 2(4.6,0)
"8MSOP (MCP Alternative)" [mm]
  rect 1.1x0.28 smd: 1(0,0)
  oval 1.1x0.28 smd: 2(0,-0.65) 3(0,-1.3) 4(0,-1.95) 5(4.1,-1.95) 6(4.1,-1.3) 7(4.1,-0.65) 8(4.1,0)
  silkscreen extent 0.2,-2.28 3.9,0.33
"10n MU Capacitor (HV)" [mil]
  round 58 hole 28: 1(0,0) 2(362.2,0)
  silkscreen extent 58,-98 304,98
"12 pole switch" [mm] "rotary switch"
  round 3.175 hole 3.175: 0(0,10.25)
  round 17.5 hole 6.604: 0(0,0.05)
  Keep-Out Layer circle w0.254: c0,10.25 r1.5
  Keep-Out Layer circle w0.254: c0,0 r8.75
"22N MU Capacitor (HV)" [mil]
  round 50 hole 28: 1(0,0) 2(370.08,0)
  silkscreen extent 50,-100 320,100
"74AC04SC 14-SOIC" [mm]
  rect 1.7x0.75 smd: 1(0,0)
  oval 1.7x0.75 smd: 2(0,-1.27) 3(0,-2.54) 4(0,-3.81) 5(0,-5.08) 6(0,-6.35) 7(0,-7.62) 8(5.7,-7.62) 9(5.7,-6.35) 10(5.7,-5.08) 11(5.7,-3.81) 12(5.7,-2.54) 13(5.7,-1.27) 14(5.7,0)
  silkscreen extent 1.68,-8.25 4.02,0.63
0603 [mm] "generic 0603 Cap/Res"
  rect 1.1x1 smd: 1(-0.85,0) 2(0.85,0)
  silkscreen extent -1.65,-0.76 1.65,0.76
0805 [mm] "generic 0805 Cap/Res"
  rect 1.3x1.5 smd: 1(-0.95,0) 2(0.95,0)
  silkscreen extent -1.91,-1.02 1.91,1.02
ABLS-16MHz-B4-T [mm] "Abracon ABLS Series 16MHz 18pF Crystal"
  rect 5.8x2.5 smd: 1(-4.75,0) 2(4.75,0)
  silkscreen extent -6.35,-2.35 6.35,2.35
ATMega_GOOD [mm]
  oval 1.5x0.5 smd: 1(-4.15,2.8) 2(-4.15,2) 3(-4.15,1.2) 4(-4.15,0.4) 5(-4.15,-0.4) 6(-4.15,-1.2) 7(-4.15,-2) 8(-4.15,-2.8) 17(4.15,-2.8) 18(4.15,-2) 19(4.15,-1.2) 20(4.15,-0.4) 21(4.15,0.4) 22(4.15,1.2) 23(4.15,2) 24(4.15,2.8)
  oval 0.5x1.5 smd: 9(-2.8,-4.15) 10(-2,-4.15) 11(-1.2,-4.15) 12(-0.4,-4.15) 13(0.4,-4.15) 14(1.2,-4.15) 15(2,-4.15) 16(2.8,-4.15) 25(2.8,4.15) 26(2,4.15) 27(1.2,4.15) 28(0.4,4.15) 29(-0.4,4.15) 30(-1.2,4.15) 31(-2,4.15) 32(-2.8,4.15)
  silkscreen extent -4.27,-3.05 3.05,3.75, body extent -3.5,-3.5 3.5,3.5, height 1.2
"Axial 0.4 MU" [mil]
  round 70 hole 40: 1(0,0) 2(400,0)
  silkscreen extent 70,-100 330,100
BAT-2 [mm] "Multicell Battery; 2 Leads"
  rect 1.5x1.5 hole 0.9: 1(-1.27,0)
  round 1.5 hole 0.9: 2(1.27,0)
  silkscreen extent -2.54,-1.27 2.54,1.27
BYG20J-E3 [mm]
  rrect50% 2x2 smd: 1(0,0)
  rect 2x2 smd: 3(4,0)
  silkscreen extent -0.04,-1.25 4,1.6
CLV1A-FKB [mm] "Cree RGB SMD LED"
  rrect50% 2x1.3 smd: 1(-1.75,0.75)
  rect 2x1.3 smd: 2(-1.75,-0.75) 3(1.75,-0.75) 4(1.75,0.75)
  silkscreen extent -1.6,-1.4 1.6,1.4
DPAK [mm]
  rect 10x10 smd: 1(8.5,-2.28)
  rect 3.2x1.6 smd: 2(0,0)
  oval 3.2x1.6 smd: 3(0,-4.56)
  silkscreen extent -0.43,-5.7 2.43,1.14
ELL6PG4R7N-2CHK [mm] "Panasonic ELL-6UH100M Inductor 10uH"
  rect 3.8x3.4 smd: 1(-2.85,0) 2(2.85,0)
  silkscreen extent -3.2,-3 3.2,3
EM6K7T2R-EMT6 [mil] "Rohm Dual Channel NMOS"
  rect 27.56x10 smd mask+0: 1(0,0)
  oval 27.56x10 smd mask+0: 2(0,-20) 3(0,-40) 4(66.93,-40) 5(66.93,-20) 6(66.93,0)
  silkscreen extent 12,-49 59,10
FSAL200-16QSOP [mm]
  rect 1.7x0.317 smd: 1(0,0)
  oval 1.7x0.317 smd: 2(0,-0.635) 3(0,-1.27) 4(0,-1.905) 5(0,-2.54) 6(0,-3.175) 7(0,-3.81) 8(0,-4.445) 9(5.4,-4.445) 10(5.4,-3.81) 11(5.4,-3.175) 12(5.4,-2.54) 13(5.4,-1.905) 14(5.4,-1.27) 15(5.4,-0.635) 16(5.4,0)
  silkscreen extent 1.73,-4.76 3.67,0.32
HDR1X2 [mm] "Connector; Header; 2 Position"
  rect 1.5x1.5 hole 0.9: 1(0,0)
  round 1.5 hole 0.9: 2(2.54,0)
  silkscreen extent -1.27,-1.27 3.81,1.27
HDR1X2H [mil] "Connector; Header; 2 Position; Right Angle"
  rect 120x120 hole 60: 1(-59.06,47.24)
  round 120 hole 60: 2(166.93,47.24)
  silkscreen extent -51,-250 150,-47
"HV connector" [mm]
  rect 2x2 smd: 1(0,0) 2(7,0)
  silkscreen extent -6,-6 13,6
"LED Headlamp" [mm]
  rect 2x1.5 smd: 1(-2.35,-2.1) 1(-2.35,0) 1(-2.35,2.1) 2(2.35,-2.1) 2(2.35,0) 2(2.35,2.1)
  silkscreen extent -2.67,3.68 1.65,4.83
NE555 [mm]
  rect 2x0.55 smd: 1(0,0)
  oval 2x0.55 smd: 2(0,-1.27) 3(0,-2.54) 4(0,-3.81) 5(4.8,-3.81) 6(4.8,-2.54) 7(4.8,-1.27) 8(4.8,0)
  silkscreen extent 1.84,-4.44 2.97,0.64
"Optical RX" [mm]
  rect 2x2 smd: 1(0,0) 2(4,0) 3(8,0)
"Optical TX" [mm]
  rect 2x2 smd: 1(0,0) 2(4,0) 3(8,0)
REG104-5-DDPAK5 [mm]
  rect 3.4x1 smd: 1(0,0)
  oval 3.4x1 smd: 2(0,-1.7) 3(0,-3.4) 4(0,-5.1) 5(0,-6.8)
  rect 15x12 smd: 6(10,-3.4)
  silkscreen extent 2.53,-7.65 8.07,0.85
"Resistor 1W" [mil]
  round 80 hole 40: 1(-393.7,0) 2(393.7,0)
  silkscreen extent -256,-98 256,98
SATA [mm]
  round 0 hole 1.524 unplated: 0(-6.375,2.362) 0(6.375,2.362)
  rect 0.9x2 smd: 1(3.81,0) 2(2.54,0) 3(1.27,0) 4(0,0) 5(-1.27,0) 6(-2.54,0) 7(-3.81,0)
  silkscreen extent -8.8,0.1 8.8,11.5
"SI3210 SMD Transformer" [mm]
  oval 4x1.2 smd: 0(0,-9.92) 0(16.36,-7.44) 0(16.36,-4.96) 0(16.36,-2.48) 2(0,-2.48) 3(0,-4.96) 4(0,-7.44) 6(16.36,-9.92) 10(16.36,0)
  rect 4x1.2 smd: 1(0,0)
  silkscreen extent 1.84,-11.16 14.53,1.24
"switch pad layout" [mm]
  rect 2x2 smd: 1(3.7,27.5) 2(0,25) 3(3.7,22.5) 5(0,20) 6(3.7,17.5) 7(0,15) 8(3.7,12.5) 9(0,10) 10(3.7,7.5) 11(0,5) 12(3.7,2.5) 13(0,0) 14(3.7,-2.5)
TestPoint [mm]
  rect 2x2 smd: 1(0,0)
"TPS7A4501KTTR heatsinked" [mm]
  rect 3.4x1 smd: 1(0.1,6.8)
  oval 3.4x1 smd: 2(0.1,5.1) 3(0.1,3.4) 4(0.1,1.7) 5(0.1,0)
  rect 26x20 smd: 6(15.7,3.4)
  silkscreen extent 2.63,-0.85 8.17,7.65
TPS61085-MSOP8 [mm] "Ti Step-Up DCDC Converter - MSOP 8 Pin Package"
  rect 1.4x0.38 smd: 1(0,0)
  oval 1.4x0.38 smd: 2(0,-0.65) 3(0,-1.3) 4(0,-1.95) 5(4.35,-1.95) 6(4.35,-1.3) 7(4.35,-0.65) 8(4.35,0)
  silkscreen extent 1.58,-2.28 2.77,0.33
"Valve male" [mm]
  rect 2x2 smd: 1(-4,5) 2(-4,0) 3(0,5) 4(0,0) 5(4,5) 6(4,0)
"Valve_3 pin" [mm] "3 pin connector for half a valve connection"
  rect 2x2 smd: 1(-4,0) 2(0,0) 3(4,0)
"Valve_pcb mount" [mil] "pcb foot print for valve connector mounting"
  round 90 hole 60: 1(-119.29,68.9) 2(-119.29,-68.9) 3(0,137.8) 4(0,0) 5(119.29,68.9) 6(119.29,-68.9)
ValveBattery+VE [mm]
  round 4.5 hole 2.54: 1(-10,0) 1(10,0)
ValveBattery-VE [mm]
  round 13 smd: 1(0,0)

## Part data
Batt201 Batt301 EL201: library part "Header 2", "Header, 2-Pin"
BT201: "Multicell Battery"
C101 C102 C103 C104 C105 C106 C107 C108 C109 C110 C111 C112 C113 C114 C115 C116 C117 C118 C119 C120 C121 C122 C123 C124 C125 C126 C127 C128 C201 C202 C203 C204 C205 C206 C207 C208 C209 C210 C211 C212 C213 C214 C215 C217 C218 C219 C220 C221 C222 C223 C224 C225 C226 C227 C228 C229 C230 C231 C232 C233 C234 C235 C236 C237 C238 C239 C240 C241 C242 C243 C244 C299 C301 C302 C303 C304 C305 C306 C307 C308 C309 C310 C311 C312 C313 C314 C315 C316 C317 C318 C319 C320 C321 C322 C323 C324 C325 C326 C327 C328 C329 C330 C331 C332 C333: library part "Cap Semi", "Capacitor (Semiconductor SIM Model)"
D101 D102 D201: library part "Diode 10TQ035", "Schottky Rectifier"
I401 I402 I403 I404 I405 I406 I407 I408 I409 I410 I411 I412 I413 I414 I415 I416 I417 I418 I419 I420 I421 I422 I423 I424 I425 I426 I427 I428 I429 I430 I431 I432 I433 I434 I435 I436 I437 I438 I439 I440 I441 I442 I443 I444: library part TestPoint
ISP101 ISP201 ISP301: library part "Header 3X2", "Header, 3-Pin, Dual row"
L101 L102 L103 L201 L301: library part Inductor, "Inductor"
LED109 LED110 LED301 LED302: library part LED0, "Typical INFRARED GaAs LED"
MOS204 MOS205: library part MOSFET-N, "N-Channel MOSFET"
Opt_Rx_201 OptRx101: "Optical receiver module"
Opt_Tx_201 OptTx101: "Optical transmitter"
P301 P302: library part "Header 2H", "Header, 2-Pin, Right Angle"
R101 R102 R103 R104 R108 R109 R110 R111 R112 R113 R114 R117 R119 R120 R121 R125 R126 R127 R128 R135 R136 R137 R138 R139 R140 R141 R142 R143 R144 R145 R146 R147 R148 R149 R150 R151 R152 R153 R201 R202 R203 R204 R205 R206 R207 R208 R209 R210 R244 R245 R260 R261 R262 R263 R263a R263b R264 R265 R266 R267 R268 R269 R270 R271 R272 R273 R274 R277 R302 R304 R305 R310 R312 R319 R320 R321 R325 R326 R327 R331 R332 R333 R334 R335: library part Res3, "Resistor"
R102A R102B R105 R106 R107 R115 R116 R118 R122 R123 R124 R211 R212 R213 R214 R215 R216 R217 R218 R219 R220 R221 R222 R223 R224 R225 R226 R227 R228 R229 R230 R231 R232 R233 R234 R235 R236 R237 R238 R239 R240 R241 R242 R243 R246 R247 R248 R249 R250 R251 R252 R253 R254 R255 R256 R257 R258 R259 R275 R276 R311 R313 R316 R317 R318 R322 R323 R324 R328 R329 R330: "Resistor"
R129 R130 R131 R132 R133 R134 R301 R303 R308 R309 R314 R315 R336 R337: library part Res1, "Resistor"
REG301 REG302 REG303: library part TPS7A4515
REG304: library part TPS7A4501
S101 S205 S301: "Switch"
S201 S204: "12 Way Switch"
S202: library part SW-SPST, "Single-Pole, Single-Throw Switch"
S203: "Single-Pole, Single-Throw Switch"
U101 U201 U301: "8-Bit AVR Microcontroller with 8K Bytes of In-System Programmable Flash Memory"
U202 U203: "ST Quad Bi-Directional Logic Switch"
U207: library part SN54HC04J, "Hex Inverter"
Valve101: library part "Header 3X2H", "Header, 3-Pin, Dual row, Right Angle"
Valve102 Valve103: "Header, 3-Pin, Right Angle"
Valve301 Valve302 Valve303: library part "Header 3X2A", "Header, 3-Pin, Dual row"
Y101 Y201 Y301: "Crystal Oscillator"

## Free pads (board coordinates)
  round 0 hole 88: 0(2105,9275) 0(2260,8740) 0(2795,8895) 0(3400,9330) 0(3555,8795) 0(4090,8950) 0(5805,2615) 0(5960,2080) 0(6495,2235) 0(6945,2625) 0(7100,2090) 0(7635,2245) 0(8160,2620) 0(8315,2085) 0(8850,2240) 0(9320,2625) 0(9475,2090) 0(10010,2245) 0(10485,2635) 0(10640,2100) 0(11175,2255) 0(11595,2625) 0(11750,2090) 0(12285,2245) 0(12745,2605) 0(12900,2070) 0(13435,2225)
  round 1377.95 hole 260: 0(2396.34,2390) 0(4401.34,2395)
  round 170 hole 100: 0(3355,9145) 0(4145,9145) 0(6895,2435) 0(7685,2435) 0(8110,2430) 0(8900,2430) 0(9275,2440) 0(10065,2440)
  round 60 hole 80 unplated: 0(4593.58,7129.09) 0(4593.58,8095.24) 0(4598.58,8649.09) 0(4598.58,9615.24) 0(6443.98,7129.09) 0(6443.98,8095.24) 0(6448.98,8649.09) 0(6448.98,9615.24)
  round 132 hole 132: 0(4865,3765) 0(4865,6585) 0(8005,3765) 0(8005,6585)
  round 125 hole 125: 0(8778,4147) 0(8778,8241) 0(14092,4147) 0(14092,8241)

## Via types
v1: diameter 50, hole 28, Top Layer to Bottom Layer, 217 vias
v2: diameter 80, hole 60, Top Layer to Bottom Layer, 55 vias
v3: diameter 40, hole 20, Top Layer to Bottom Layer, 25 vias
v4: diameter 70, hole 50, Top Layer to Bottom Layer, 11 vias
v5: diameter 145, hole 125, Top Layer to Bottom Layer, 8 vias
v6: diameter 80, hole 40, Top Layer to Bottom Layer, 2 vias
v7: diameter 60, hole 40, Top Layer to Bottom Layer, 2 vias
v8: diameter 50, hole 28, Top Layer to Bottom Layer, tented top, 1 vias
v9: diameter 100, hole 80, Top Layer to Bottom Layer, 1 vias
v10: diameter 100, hole 60, Top Layer to Bottom Layer, 1 vias

## Nets (pads, with @x,y where several pads share a name; then routed paths per layer and width w, separated by ;. In a path a pad name is that pad's centre, name@x,y a point inside that pad or via, vN(x,y) a via of type N, cw(c..) or ccw(c..) an arc to the next point about the centre after c; other vN are vias at no path point)
555OSC_201: R269.1 TP224.1 U204.3 U207.1 | length 735.6
  Top Layer w20: v1(7715,5545) 7760,5590 7760,5725
  Bottom Layer w20: R269.1@7737.4,5780 7765,5752.4 7765,5595 v1(7715,5545) 7795,5545 U207.1@7820,5520 7900,5520 7935,5485 TP224.1@7935,5460
ACOSC_201: R262.2 R270.1 TP219.1 U205.3 | length 710.8
  Top Layer w20: v1(7920,6320) 7995,6320 8040,6275 v1(8040,5985)
  Bottom Layer w20: R262.2@7805,6320 v1(7920,6320) ; R270.1@8002.6,6060 8002.6,6002.4 v1@8020,5985 ; U205.3@8040,5900 v1(8040,5985)
B_CONTROL_101: I141.1 I142.1 MOS109.3 MOS109.6 | length 397.8
  Top Layer w40: v1(2915,7575) 2915,7550 2962.5,7502.5 I141.1@2965,7500 ; I142.1@2960,7800 3020,7740 v1(3020,7665)
  Bottom Layer w40: v1(2915,7575) 2930,7575 v1(3020,7665)
B_CONTROL_101L: I116.1 R101.1 R140.1 R142.1 R144.1 | length 5491.5
  Top Layer w10: v1@2690,1540 v1(2695,1535)
  Top Layer w30: v1@1540,2100 R144.1@1540,2162.6 ; v1(2075,3235) R140.1@2140,3235 ; R101.1@2633.46,1540 v1@2690,1540 ; v1(3255,2700) 3260,2695 R142.1@3260,2613.46
  Bottom Layer w20: v1@1539.2,2084.37 cw(c2396.34,2390) 1940.99,1602.12 1900,1643.11 I116.1@1900,1720
  other v1: 1545,2085
B_CONTROL_101R: I118.1 R146.1 R148.1 R150.1 R152.1 | length 4499.1
  Top Layer w30: R146.1@3640,2613.46 3665.83,2613.46 v1@3687.36,2635 ; v1@4175,1681.02 4175,1651.54 R148.1@4186.54,1640 ; R152.1@4613.46,3140 v1(4650,3085) ; v1(5105,2170) R150.1@5180,2170
  Bottom Layer w10: I118.1@3779.13,1845.87 I118.1@3790,1835
  Bottom Layer w20: I118.1@3779.13,1845.87 3779.13,2013.22 cw(c4401.34,2395) v1@4173.74,1701.39
  other v1: 4175,1700 3705,2640
B_PWM_101: I132.1 U101.2 | length 424.4
  Bottom Layer w10: I132.1@5165,8060 5215,8060 5240,8035 5240,7841.43 5271.43,7810 5305,7810 5331.26,7783.74 U101.2@5331.26,7753.39
B_PWM_101A: I146.1 MOS109.2 MOS109.5 R109.2 | length 281.9
  Top Layer w10: I146.1@2845,7655 2875,7655 2910,7620 MOS109.5@2933.07,7620 MOS109.2@3000,7620 3035,7620 3060,7595 3095,7595 3098.27,7591.73 R109.2@3100,7590
BATT+301: Batt301.1 C315.2 C316.2 R311.2 REG304.4 TP307.1 | length 3222.5
  Top Layer w30: R311.2@11687.4,6965 11890,6965 12035,6820 v1(12780,6820) ; REG304.4@13148.07,7168.94 13148.07,7071.93 13190,7030 13190,7005 ; C315.2@13190,6878.46 C316.2@13290,6878.46 ; C316.2@13290,6882.4 13402.4,6882.4 ; Batt301.1@13700,6805 13700.91,6804.09 Batt301.1@13705,6800
  Top Layer w60: TP307.1@13710,6625 Batt301.1@13710,6795
  Top Layer w80: 13210,7005 13300,7005 13500,6805 Batt301.1@13700,6805
  Bottom Layer w30: v1(12780,6820) 13685,6820 Batt301.1@13700,6805
BATT-301: Batt301.2 R336.2 R337.2 REG304.5 | length 965.2
  Top Layer w30: REG304.5@13215,7168.94 13283.94,7168.94
  Top Layer w80: 13290,7170 13528.7,7170 R337.2@13630,7271.3 ; 13600,7210 13702.76,7107.24 Batt301.2@13702.76,7031.93 ; R337.2@13636.3,7271.3 R336.2@13930,7271.3
BATTEN301: R335.2 REG304.1 TP309.1 U301.24 | length 1753.5
  Top Layer w20: v1(12640,7145) 12685,7145 R335.2@12690,7150
  Top Layer w30: R335.2@12690,7150 12695,7150 12745,7150 12760,7165 TP309.1@12815,7165 ; TP309.1@12818.94,7168.94 REG304.1@12947.28,7168.94
  Bottom Layer w20: U301.24@11560.24,6723.39 11978.39,6723.39 12050,6795 12050,7115 12080,7145 v1(12640,7145)
BATTERY_SENSE_201: R263.2 R274.1 U201.22 | length 1156.2
  Top Layer w10: U201.22@5917.24,5146.61 5917.24,5092.76 5980,5030
  Top Layer w30: R263.2@5895,4290 5895,4430 5780,4545 5780,4565 6005,4790 6005,4900 5980,4925 5980,5030
  Top Layer w40: R263.2@5895,4287.4 R274.1@6017.4,4287.4
BATTERYSENSE_101: I103.1 U101.19 | length 246.6
  Bottom Layer w10: I103.1@5420,7200 5420,7245 5460,7285 5460,7426.61 U101.19@5460,7430
BATTERYSENSE_101B: C110.2 C111.2 C114.2 C115.2 I106.1 L102.1 L103.1 PWR101.3 PWR101.6 PWR101.7 PWR102.6 PWR102.7 TP117.1 Valve101.6 | length 3948.6
  Top Layer w10: L102.1@5955,9550 L102.1@6027.8,9550 6050,9527.8 6050,9305.67 PWR101.7@6045.59,9301.26 6045.59,9259.41 6055,9250 6065,9250 6071.18,9256.18 PWR101.6@6071.18,9301.26 ; v1(6030,8965) 6057.6,8965 ; PWR101.3@6071.18,9130 6071.18,9041.42 C110.2@6102.6,9010
  Top Layer w30: C111.2@6102.6,8893.94 C110.2@6102.6,9010
  Top Layer w40: Valve101.6@5100,9247.01 Valve101.6@5100.55,9246.46 ; TP117.1@5820,9610 TP117.1@5840,9590 ; v1(5983.94,9446.06) 5983.94,9506.14 L102.1@6027.8,9550 ; 6057.6,8965 C110.2@6102.6,9010
  Top Layer w50: Valve101.6@5100,9247.01 I106.1@5100,9610 TP117.1@5820,9610 ; TP117.1@5840,9590 5915,9590 L102.1@5955,9550
  Bottom Layer w10: 5840.59,9039.41 PWR102.7@5840.59,9088.74 ; 5866.18,9015.97 PWR102.6@5866.18,9088.74
  Bottom Layer w20: 5840.59,9039.41 5902.8,8977.2
  Bottom Layer w40: Valve101.6@5100.55,9246.46 Valve101.6@5138.54,9246.46 ; 5902.8,8792.8 L103.1@5902.8,8860 L103.1@5902.8,8907.8 ; 5902.8,8977.2 L103.1@5902.8,8907.8 ; v1(5983.94,9446.06) 6062.6,9446.06 6066.54,9446.06 C115.2@6066.54,9350 ; v1(6030,8965) 5960,8965 L103.1@5902.8,8907.8
  Bottom Layer w50: Valve101.6@5138.54,9246.46 5685,8700 5810,8700 5902.8,8792.8
BATTSENSE301: R311.1 R313.2 TP308.1 U301.22 | length 774.4
  Top Layer w20: TP308.1@11610,7260 v1(11610,7150) 11610,7085 11610,6970 11613.8,6966.2 R311.1@11615,6965
  Bottom Layer w20: U301.22@11495.75,6720 11495.75,6723.39 11495.75,6779.32 11610,6893.57 v1(11610,7150)
COLOUR_EN_201: I216.1 U201.14 | length 287.8
  Top Layer w10: I216.1@5440,5320 5485,5320 5540,5265 U201.14@5705,5265
COLOUR_EN_201A: I212.1 Reg201.5 | length 145.1
  Bottom Layer w10: Reg201.5@7675,8172.28 7802.72,8172.28 I212.1@7815,8160
DATA201: I222.1 U201.25 | length 382.1
  Top Layer w10: U201.25@6033.39,5199.76 6033.39,5161.61 6220,4975 I222.1@6300,4975
DATA201A: I205.1 U203.4 | length 301.3
  Bottom Layer w10: I205.1@7355,7300 7360,7295 7534.5,7295 7560,7320.5 7560,7349.5 7570,7359.5 U203.4@7570,7400
DATA202: I221.1 U201.26 | length 718.1
  Top Layer w10: U201.26@6033.39,5231.26 6056.71,5231.26 6077.91,5210.05 6077.91,5157.09 6185,5050 6355,5050 6365,5040 6365,4835 6350,4820 I221.1@6300,4820
DATA202A: I206.1 U203.7 | length 90
  Bottom Layer w10: U203.7@7645,7400 I206.1@7645,7490
DATA203: I202.1 U201.27 | length 938.2
  Top Layer w10: U201.27@6033.39,5262.76 6040.04,5256.1 6063.36,5256.1 6077.91,5241.55 6077.91,5240.52 6097.91,5220.52 6097.91,5182.09 6200,5080 6370,5080 6395,5055 6395,4690 6365,4660 I202.1@6305,4660